# Altium PCB Front_LED_Module.PcbDoc
Units mm, origin at the board's own origin, x right, y up, seen from the top; angles counter-clockwise.
Board outline 152.4 x 101.6 mm, 2 copper layers (Top Layer, Bottom Layer); 9 components, 4 nets, 18 pads, 0 vias.
Unrouted connection lines stored in the file: 10.
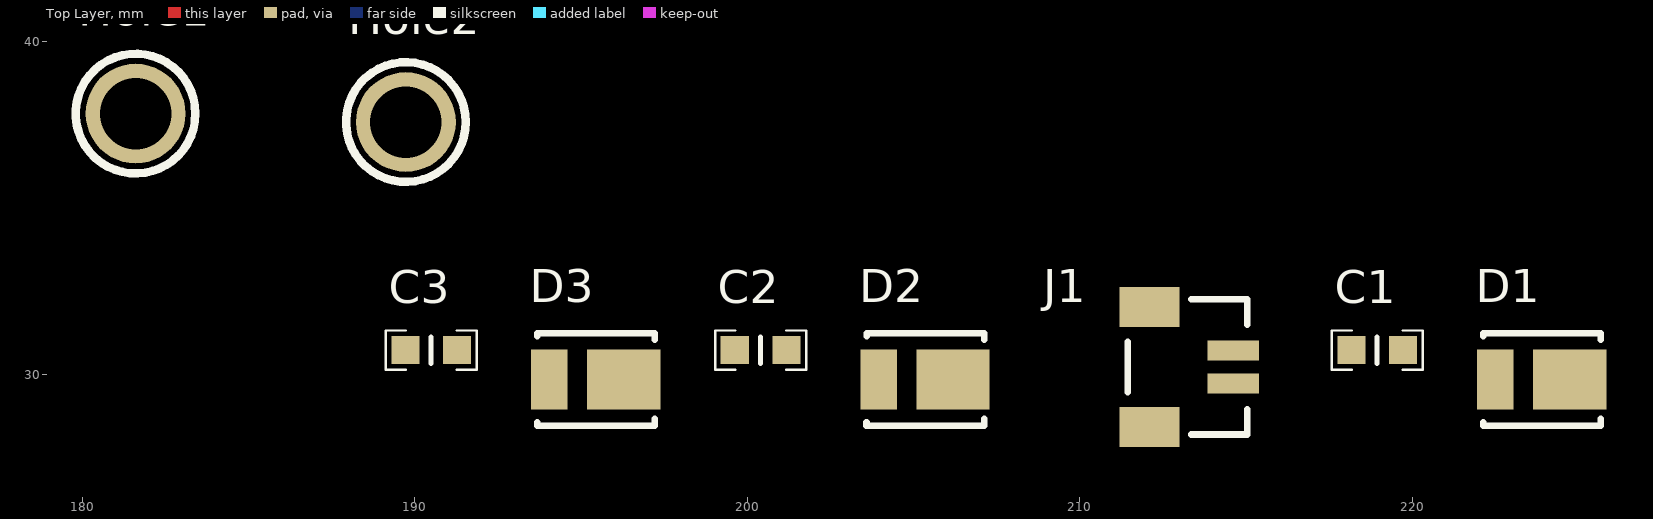
[diagram p0: Top Layer view]
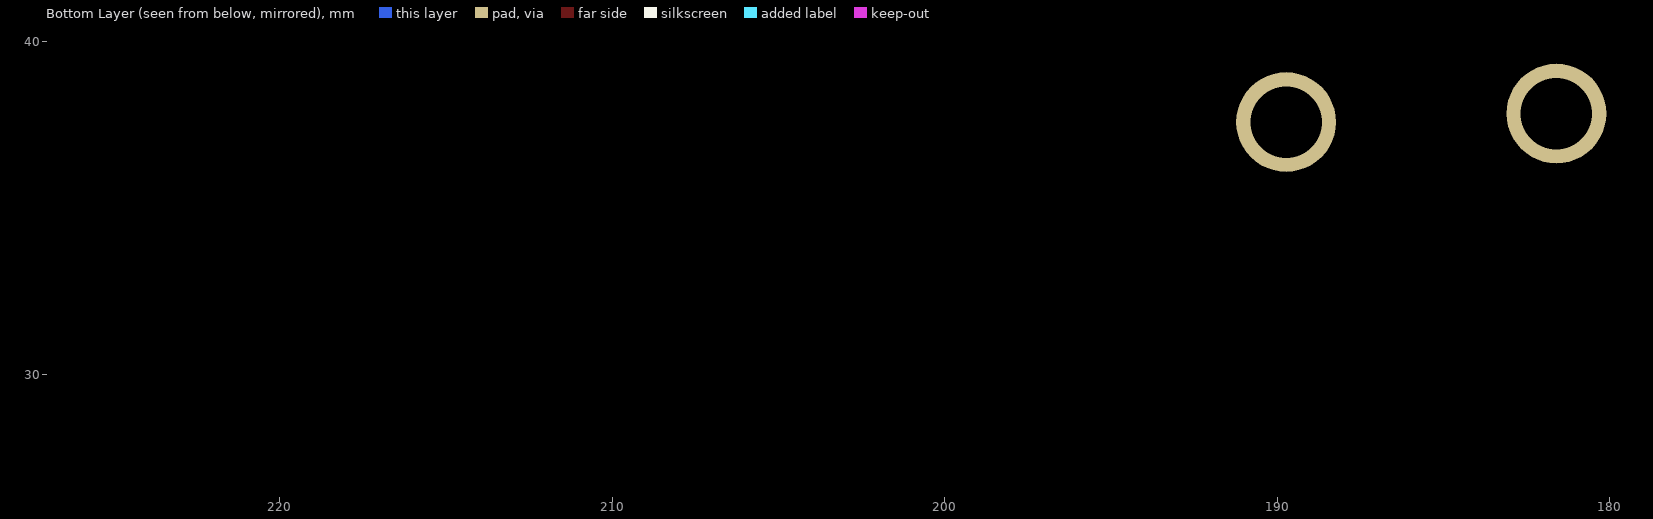
[diagram p1: Bottom Layer view, seen from below]

## Layer stack, top to bottom
Top Solder: solder mask 0.0102, Solder Resist, Dk 3.5
Top Layer: signal copper 0.0356
Dielectric 1: dielectric 0.32, FR-4, Dk 4.8
Bottom Layer: signal copper 0.0356
Bottom Solder: solder mask 0.0102, Solder Resist, Dk 3.5

## Board outline
25.4,25.4 177.8,25.4 177.8,127 25.4,127

## Design rules (kind name [scope] priority, off if disabled: settings)
BoardOutlineClearance [All] p1: gap=0.2 ignorepadtopadclearanceinfootprint=FALSE
Clearance "Stitching GND" [IsStitchingVia and InNet('GND') vs (IsVia and (Not IsStitchingVia)) Or IsPad] p1: gap=0.2 ignorepadtopadclearanceinfootprint=FALSE except(0.15: SMDPad-SMDPad; 0.28: Arc-Hole Track-Hole)
Clearance [All] p2: gap=0.2 ignorepadtopadclearanceinfootprint=FALSE except(0.15: SMDPad-SMDPad; 0.28: Arc-Hole Track-Hole)
HoleSize [All] p1: absolutevalues=TRUE maxlimit=6 minlimit=0.3 maxpercent=80.000 minpercent=20.000
HoleToHoleClearance HoleToHolePad [IsPad vs IsPad] p1: gap=0.45 allowstackedmicrovias=TRUE
HoleToHoleClearance HoleToHoleVia [IsVia vs IsVia] p2: gap=0.2 allowstackedmicrovias=TRUE
HoleToHoleClearance [All] p3: gap=0.3 allowstackedmicrovias=TRUE
MinimumAnnularRing MinimumViaAnnularRing [IsVia] p1: minimumring=0.15
MinimumAnnularRing [All] p2: minimumring=0.254
MinimumSolderMaskSliver [All] p1: minsoldermaskwidth=0.1
PlaneConnect [All] p1: planeconnectstyle=Relief reliefexpansion=0.508 reliefentries=4 reliefconductorwidth=0.32 reliefairgap=0.254
PolygonConnect MolexPwrGND [InNet('GND') vs IsPad And HasFootprint('43045-08YY_121314')] p1: connectstyle=Relief reliefconductorwidth=1 reliefentries=4 polygonreliefangle="90 Angle" conductorbypadedge=TRUE mindistance=0.381 enablemindistance=FALSE airgapwidth=0.35
PolygonConnect DRVTherrmalGND [InNet('GND') vs IsPad And HasFootprint('RXZ0016A-MFG')] p2: connectstyle=Direct reliefconductorwidth=0.254 reliefentries=4 polygonreliefangle="90 Angle" airgapwidth=0.254
PolygonConnect GNDStitchingDirect [InNet('GND')] p3: thpad.connectstyle=Relief thpad.reliefconductorwidth=0.32 thpad.reliefentries=4 thpad.polygonreliefangle="90 Angle" thpad.airgapwidth=0.254 thpad.conductorbypadedge=TRUE thpad.mindistance=0.381 thpad.enablemindistance=FALSE smdpad.connectstyle=Relief smdpad.reliefconductorwidth=0.32 smdpad.reliefentries=4 smdpad.polygonreliefangle="90 Angle" smdpad.airgapwidth=0.254 smdpad.conductorbypadedge=TRUE smdpad.mindistance=0.381 smdpad.enablemindistance=FALSE via.connectstyle=Direct via.reliefconductorwidth=0.254 via.reliefentries=4 via.polygonreliefangle="90 Angle" via.airgapwidth=0.254
PolygonConnect [All] p4: connectstyle=Relief reliefconductorwidth=0.32 reliefentries=4 polygonreliefangle="90 Angle" conductorbypadedge=TRUE mindistance=0.381 enablemindistance=FALSE airgapwidth=0.254
RoutingVias PowerVias [InNetClass('POWER') or InNet('GND')] p1: holewidth=0.5 width=0.8 viastyle="Through Hole" minholewidth=0.3 minwidth=0.6 maxholewidth=1.2 maxwidth=1.6
RoutingVias SignalVias [All] p2: holewidth=0.3 width=0.6 viastyle="Through Hole" minholewidth=0.3 minwidth=0.6 maxholewidth=0.5 maxwidth=0.8
SilkToSilkClearance [All] p1: silktosilkclearance=0.1
SilkToSolderMaskClearance [IsPad] p1: minsilkscreentomaskgap=0.1 clearancetoexposedcopper=TRUE
SolderMaskExpansion [All] p1: expansion=0.05 istentingtop=FALSE
SupplyNets "Schematic Supply Nets" [InNet('GND')] p1: voltage=0.000
Width WidthPower [InNetClass('POWER') or InNet('GND')] p1: maxlimit=3 minlimit=0.2 preferedwidth=0.6
Width WidthSignal [All] p2: maxlimit=1 minlimit=0.2 preferedwidth=0.3
24 further rules are at their usual default settings.

## Components (designator, comment, footprint, x,y, rotation, side; value= is the part's Value field where it differs from the comment)
C1 "10nF" CAP_SMD_603 218.948,30.734 r0 top
C2 "10nF" CAP_SMD_603 200.406,30.734 r0 top
C3 "10nF" CAP_SMD_603 190.5,30.734 r0 top
D1 "L128-6580SA35A0DF1" "CREE J 2835" 223.774,29.845 r0 top
D2 "L128-6580SA35A0DF1" "CREE J 2835" 205.232,29.845 r0 top
D3 "L128-6580SA35A0DF1" "CREE J 2835" 195.326,29.845 r0 top
Hole1 "Hole" Hole_2mm 181.61,37.846 r0 top
Hole2 "Hole" Hole_2mm 189.738,37.592 r0 top
J1 "BM02B-SRSS-TB(LF)(SN)" "JST BM02B-SRSS-TB" 213.36,30.226 r90 top

## Footprints (in the part's own frame and the unit in brackets; to place one, negate y for a bottom-side part, rotate by r counter-clockwise, add the part's x,y. Pads: shape width x height; smd on the part's side, far side on the other; paste and mask are expansions set on the pad)
CAP_SMD_603 [mm]
  rect 0.85x0.85 smd: 1(-0.775,0) 2(0.775,0)
  silkscreen extent -1.37,-0.59 1.37,0.59, body extent -0.8,-0.4 0.8,0.4, height 0.9
"CREE J 2835" [mm] "LED, 2-Leads, Body 3.5x2.8mm, CREE JE2835AWT-00-0000-000A0ZF627E"
  rect 2.2x1.8 smd: 1(0.962,0)
  rect 1.1x1.8 smd: 2(-1.278,0)
  silkscreen extent -1.64,-1.39 1.9,1.4, body extent -1.62,-1.4 1.9,1.4, height 0.7
Hole_2mm [mm]
  round 3 hole 2.15: 1(0,0)
  silkscreen extent -1.8,-1.8 1.8,1.8
"JST BM02B-SRSS-TB" [mm] "1.0mm pitch/Disconnectable Crimp style connector"
  rect 0.6x1.55 smd: 1(-0.5,-1.262) 2(0.5,-1.262)
  rect 1.2x1.8 smd: M(-1.8,1.262) M(1.8,1.262)
  silkscreen extent -2.03,-1.68 2.03,1.91, body extent -2,-1.69 2,1.91, height 4.32

## Part data
C1 C2 C3: library part "Non-polar Capacitor", "Generic Ceramic Capacitor", Voltage=16V
D1 D2 D3: library part JE2835AWT-R-H40GA0000-N0000001, "LED COOL WHITE 6500K LUXEON 2835 2.7V", Part Number=L128-6580SA35A0DF1
J1: "CONN HEADER SMD 2POS 1MM", Current Rating (Amps)=0.7A, Insulation Color=Natural, Manufacturer="JST Sales America Inc.", Material Flammability Rating="UL94 V-0", Operating Temperature="-25°C ~ 85°C", Supplier Part Number 1=455-1788-1-ND, Voltage Rating=50V, ComponentLink1Description=Datasheet, ComponentLink1URL=http://www.jst-mfg.com/product/pdf/eng/eSR.pdf, ComponentLink2Description="DigiKey Link", ComponentLink2URL=http://digikey.com/product-detail/en/jst-sales-america-inc/BM02B-SRSS-TB-LF-SN/455-1788-1-ND/926859, Connector Type=Header, Contact Finish - Mating=Tin, Contact Finish - Post=Tin, Contact Material="Copper Alloy", Contact Shape=Square, Contact Type="Male Pin", Fastening Type=Push-Pull, Features="Solder Retention", Insulation Height="0.167\" (4.25mm)", Insulation Material="Polyamide (PA), Nylon", LastUpdated="1/12/2020 10:11:04 PM", Lifecycle Status=Active, Minimum Order=1, Mounting Type="Surface Mount", Number of Positions=2, Number of Positions Loaded=All, Number of Rows=1, Packaging=TapeAndReel, Part Number=BM02B-SRSS-TB(LF)(SN), Part Status=Active, PartId=12, Pitch - Mating="0.039\" (1.00mm)", Price=0.22, Series=SR, Shrouding="Shrouded - 4 Wall", Style="Board to Cable/Wire", Supplier 1=DigiKey, Termination=Solder

## Nets (pads, with @x,y where several pads share a name; then routed paths per layer and width w, separated by ;. In a path a pad name is that pad's centre, name@x,y a point inside that pad or via, vN(x,y) a via of type N, cw(c..) or ccw(c..) an arc to the next point about the centre after c; other vN are vias at no path point)
CC_LED: C1.1 D1.1 J1.1
GND: C3.2 D3.2 J1.2
NetC1_2: C1.2 C2.1 D1.2 D2.1
NetC2_2: C2.2 C3.1 D2.2 D3.1
pads on no net: Hole1.1 Hole2.1 J1.M